# Altium PCB FuenteCapacitiva1.PcbDoc
Units mil, origin at the board's own origin, x right, y up, seen from the top; angles counter-clockwise.
Board outline 6000 x 4000 mil, 2 copper layers (Top Layer, Bottom Layer); 15 components, 9 nets, 30 pads, 0 vias.
Unrouted connection lines stored in the file: 21.
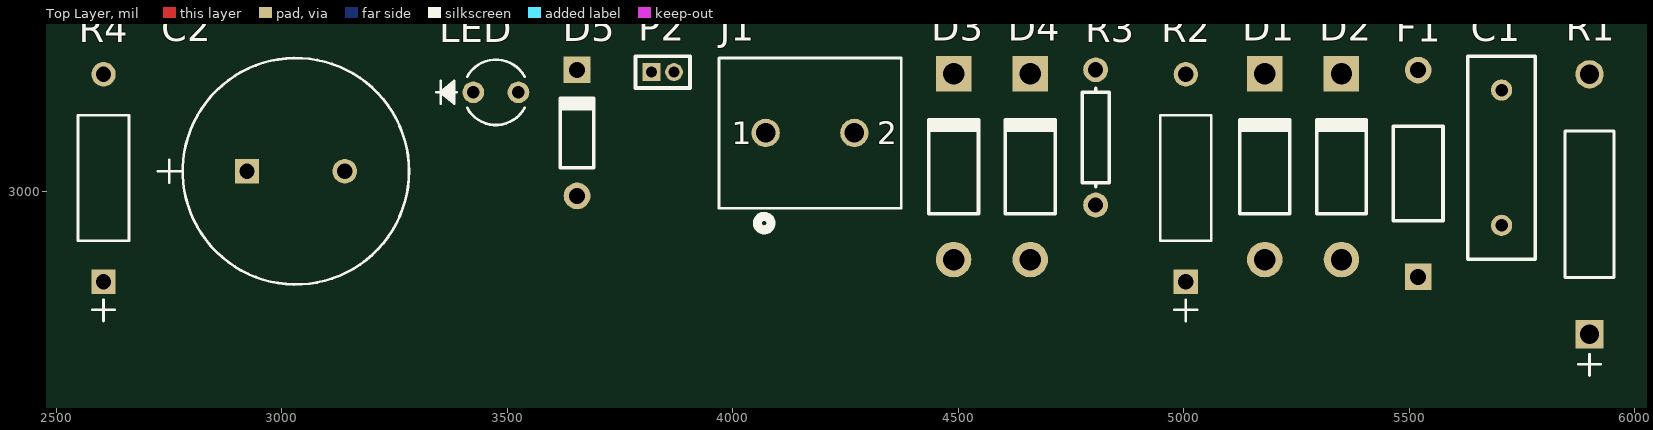
[diagram p0: Top Layer view]
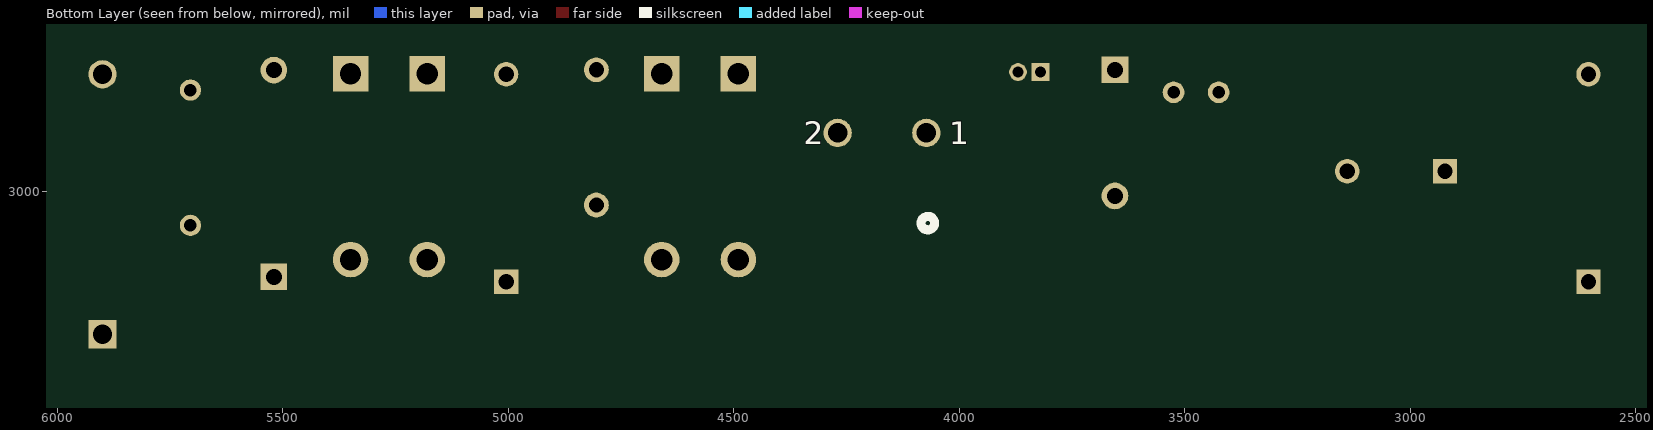
[diagram p1: Bottom Layer view, seen from below]

## Layer stack, top to bottom
Top Solder: solder mask 0.4, Solder Resist, Dk 3.5
Top Layer: signal copper 1.4
Dielectric 1: dielectric 12.6, FR-4, Dk 4.8
Bottom Layer: signal copper 1.4
Bottom Solder: solder mask 0.4, Solder Resist, Dk 3.5

## Board outline
1000,1000 7000,1000 7000,5000 1000,5000

## Design rules (kind name [scope] priority, off if disabled: settings)
Clearance [All] p1: gap=10
PolygonConnect [All] p1: connectstyle=Relief reliefconductorwidth=10 reliefentries=4 polygonreliefangle="90 Angle" airgapwidth=10
RoutingVias [All] p1: holewidth=28 width=50 viastyle="Through Hole" minholewidth=28 minwidth=50 maxholewidth=28 maxwidth=50
SolderMaskExpansion [All] p1: expansion=4
UnpouredPolygon [All] p1: allowunpoured=FALSE
Width [All] p1: maxlimit=10 minlimit=10 preferedwidth=10
29 further rules are at their usual default settings.

## Components (designator, comment, footprint, x,y, rotation, side; value= is the part's Value field where it differs from the comment)
C1 "cap" RAD-0.3 5705,3074.76 r90 top
C2 "1000uF 50v" "CAP_12.5 X 25" 3140,3044.76 r0 top
D1 "1N4007" DO-41 5180,3054.76 r90 top
D2 "1N4007" DO-41 5350,3054.76 r90 top
D3 "1N4007" DO-41 4490,3054.76 r90 top
D4 "1N4007" DO-41 4660,3054.76 r90 top
D5 "1N5231B" DO-35 3655,3129.76 r90 top
F1 "Fuse 5A" PIN-W2/E2.8 5520,3039.76 r90 top
J1 "282836-2" CONN2_282836-2 4270,3129.76 r0 top
LED "" HLMP 3525,3219.76 r0 top
P2 "MHDR1X2" MHDR1X2 3820,3264.76 r0 top
R1 "270k 1w" PR01 5900,3259.76 r90 top
R2 "100R 1W" YAG_FMP100 5005,3259.76 r90 top
R3 "Res1" AXIAL-0.3 4805,3119.76 r90 top
R4 "100R 1W" YAG_FMP100 2605,3259.76 r90 top

## Footprints (in the part's own frame and the unit in brackets; to place one, negate y for a bottom-side part, rotate by r counter-clockwise, add the part's x,y. Pads: shape width x height; smd on the part's side, far side on the other; paste and mask are expansions set on the pad)
AXIAL-0.3 [mm] "Axial Device, Thru-Hole; 2 Leads; 0.3 in Pin Spacing"
  round 1.4 hole 0.85: 1(-3.81,0) 2(3.81,0)
  silkscreen extent -2.77,-0.76 2.77,0.76
"CAP_12.5 X 25" [mil]
  rect 54x54 hole 34 mask+0: 1(-217,0)
  round 54 hole 34 mask+0: 2(0,0)
  silkscreen extent -414,-251 142,251, body extent 0,0 10,10, height 10
CONN2_282836-2 [mil]
  round 63 hole 43 mask+0: 1(-196.85,0) 2(0,0)
  silkscreen extent -300,-215 104,166, body extent 0,0 10,10, height 10
DO-35 [mm] "Diode, Axial; Body 3.8 x 1.9 mm (LxDia. max), Lead Dia. 0.53 mm (max)"
  round 1.5 hole 0.9: 1(-3.55,0)
  rect 1.5x1.5 hole 0.9: 2(3.55,0)
  silkscreen extent -1.95,-0.95 2.05,0.95
DO-41 [mm] "Diode, Axial; Body 5.2 x 2.7 mm (LxDia. max), Lead Dia. 0.86 mm (max)"
  round 2 hole 1.2: 1(-5.23,0)
  rect 2x2 hole 1.2: 2(5.23,0)
  silkscreen extent -2.65,-1.4 2.75,1.4
HLMP [mil]
  round 48 hole 28 mask+0: 1(-100,0) 2(0,0)
  silkscreen extent -182,-72 14,72, body extent 0,0 10,10, height 10
MHDR1X2 [mm] "Connector; Header; 2 Position"
  rect 1x1 hole 0.6: 1(0,0)
  round 1 hole 0.6: 2(1.27,0)
  silkscreen extent -0.9,-0.9 2.17,0.9
PIN-W2/E2.8 [mm] "Thru-Hole; 2 Leads"
  rect 1.5x1.5 hole 0.9: 1(-5.825,0)
  round 1.5 hole 0.9: 2(5.825,0)
  silkscreen extent -2.65,-1.4 2.65,1.4
PR01 [mil]
  rect 62.68x62.68 hole 43 mask+0: 1(-576.38,0)
  round 62.68 hole 43 mask+0: 2(0,0)
  silkscreen extent -668,-54 -126,54, body extent 0,0 10,10, height 10
RAD-0.3 [mm] "Radial Cap, Thru-Hole; 2 Leads; 0.3 in Pin Spacing"
  round 1.2 hole 0.7: 1(-3.81,0) 2(3.81,0)
  silkscreen extent -5.71,-1.91 5.71,1.91
YAG_FMP100 [mil]
  rect 54x54 hole 34 mask+0: 1(-460,0)
  round 54 hole 34 mask+0: 2(0,0)
  silkscreen extent -547,-57 -91,56, body extent 0,0 10,10, height 10

## Part data
C1: library part Cap, "Capacitor"
C2: library part UVY1H102MHD, "Imported"
D1 D2 D3 D4: "1.0 Ampere General Purpose Rectifier"
D5: "Half Watt Zener"
F1: library part "Fuse 1", "Fuse"
J1: "TERMI-BLOK PCB MOUNT  90 2P."
LED: library part HLMP-1301, "Imported"
P2: "Header, 2-Pin"
R1: library part PR01000104703JR5, "Imported"
R2 R4: library part FMP100JR-52-100R, "Imported"
R3: "Resistor"

## Nets (pads, with @x,y where several pads share a name; then routed paths per layer and width w, separated by ;. In a path a pad name is that pad's centre, name@x,y a point inside that pad or via, vN(x,y) a via of type N, cw(c..) or ccw(c..) an arc to the next point about the centre after c; other vN are vias at no path point)
GND: C2.2 D1.1 D3.1 D5.1 LED.1 P2.2
NetC1_1: C1.1 F1.2 R1.1
NetC1_2: C1.2 D1.2 D2.1 R1.2
NetC2_1: C2.1 D2.2 D4.2 R2.1
NetD3_2: D3.2 D4.1 R4.2
NetD5_2: D5.2 P2.1 R2.2 R3.1
NetF1_1: F1.1 J1.1
NetJ1_2: J1.2 R4.1
NetLED_2: LED.2 R3.2

## Text inside footprints (layer, text, board x,y; h text height)
J1: Top Overlay "2" at 4320.5,3104.76 h50; Top Overlay "2" at 4320.5,3104.76 h50; Top Overlay "1" at 3997.65,3104.76 h50; Top Overlay "1" at 3997.65,3104.76 h50; Mechanical 13 "2" at 4320.5,3104.76 h50; Mechanical 13 "2" at 4320.5,3104.76 h50; Mechanical 13 "1" at 3997.65,3104.76 h50; Mechanical 13 "1" at 3997.65,3104.76 h50; Bottom Overlay "2" at 4345.5,3104.76 h50; Bottom Overlay "2" at 4345.5,3104.76 h50; Bottom Overlay "1" at 4022.65,3104.76 h50; Bottom Overlay "1" at 4022.65,3104.76 h50